# EAGLE board opbouw (EAGLE 6.3)
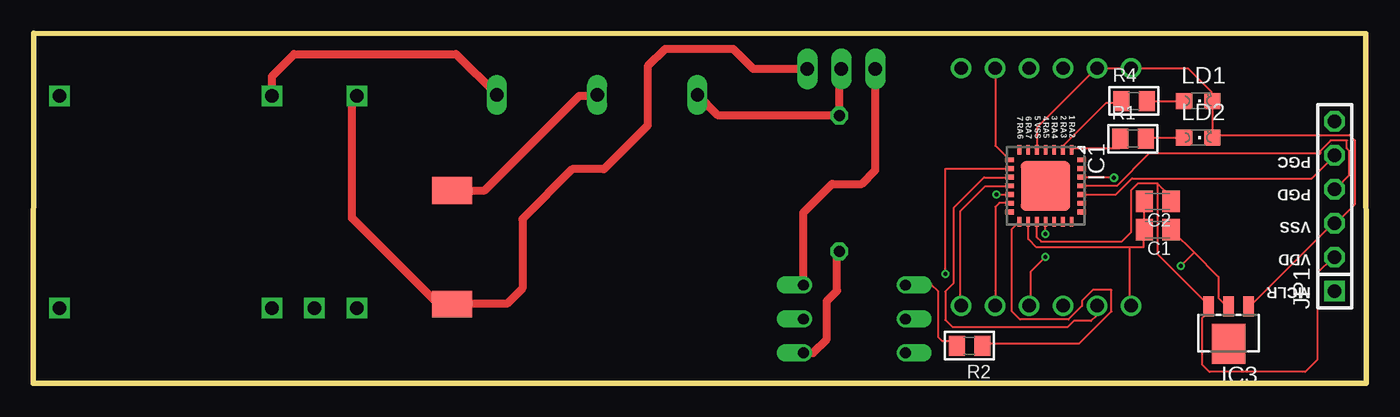
[diagram p0: board, top side]
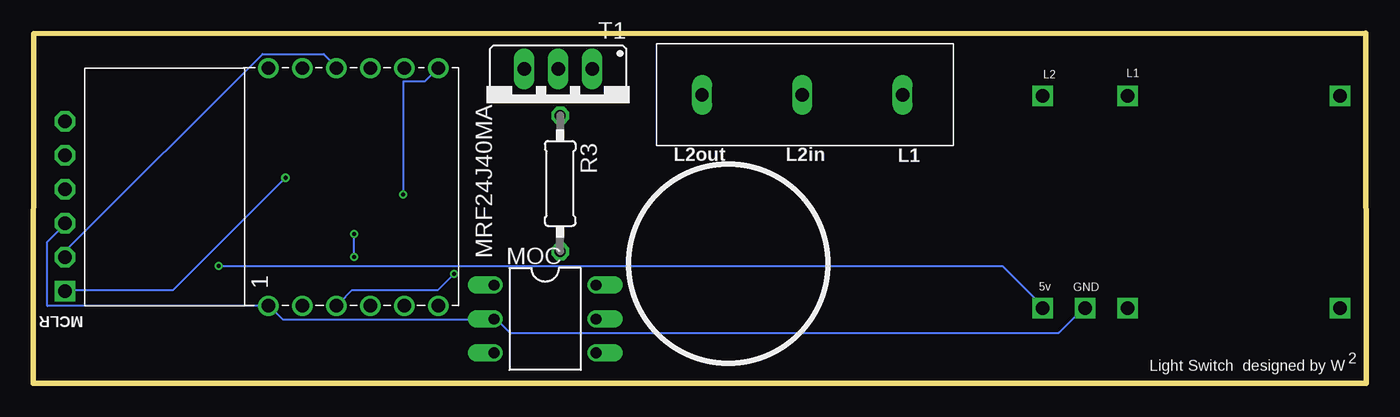
[diagram p1: board, bottom side, seen from below]

Size 99.62 x 26.18 mm. Coordinates in mm from the lower left corner, seen from the top.
Outline: 0,0 0.02,26.18 99.6,26.14 99.62,0 0,0
Copper layers (1*16): Top 0.035mm / dielectric 1.5mm / Bottom 0.035mm
Design rules "ITEADstudio_DRC": minimum track width 6mil, minimum drill 12mil, track to track 6mil, track to pad 6mil, pad to pad 6mil, via to via 6mil, smd to smd 0mil, copper to edge 10mil, drill to drill 10mil, minimum pad ring 10mil, minimum via ring 6mil, stop-mask expansion 2mil, vias tented up to drill 100mil, thermal gap 10mil

## Footprints (pad centres in the part's own frame; a part is rotated, then mirrored left to right if it is on the bottom)
C0805K = smd 1.3 x 1.6: 1 -1,0; 2 1,0
QFN28-ML_6X6MM = smd 0.7 x 0.35: 1 -2.7,1.95; 2 -2.7,1.3; 3 -2.7,0.65; 4 -2.7,0; 5 -2.7,-0.65; 6 -2.7,-1.3; 7 -2.7,-1.95; 15 2.7,-1.95; 16 2.7,-1.3; 17 2.7,-0.65; 18 2.7,0; 19 2.7,0.65; 20 2.7,1.3; 21 2.7,1.95 | smd 0.35 x 0.7: 8 -1.95,-2.7; 9 -1.3,-2.7; 10 -0.65,-2.7; 11 0,-2.7; 12 0.65,-2.7; 13 1.3,-2.7; 14 1.95,-2.7; 22 1.95,2.7; 23 1.3,2.7; 24 0.65,2.7; 25 0,2.7; 26 -0.65,2.7; 27 -1.3,2.7; 28 -1.95,2.7 | smd 3.7 x 3.7: EXP 0,0
SOT89 = smd 0.8 x 1.5: 1 -1.5,-1.75; 2 0,-1.75; 3 1.5,-1.75 | smd 2.5 x 3: 4 0,1.05
1X06 = drill 1.016 square: 1 -6.35,0 | drill 1.016 octagon: 2 -3.81,0; 3 -1.27,0; 4 1.27,0; 5 3.81,0; 6 6.35,0
CHIPLED_0805 = smd 1.2 x 1.2: A 0,-1.05; C 0,1.05
DIL06 = drill 0.813 offset: 1 -2.54,-3.81; 2 0,-3.81; 3 2.54,-3.81; 4 2.54,3.81; 5 0,3.81; 6 -2.54,3.81
R0805 = smd 1.2 x 1.5: 1 -0.953,0; 2 0.953,0
0207/10 = drill 0.813 octagon: 1 -5.08,0; 2 5.08,0
TO220CS = drill 1.016 long: A 0,-2.54; C -2.54,-2.54; G 2.54,-2.54
MRF24J40MA = drill 1: CS(LOW) 16.764,4.064; GND -1.016,14.224; GND1 16.764,11.684; GND2 16.764,14.224; INT -1.016,6.604; NC 16.764,6.604; RESET -1.016,11.684; SCK -1.016,1.524; SDI -1.016,4.064; SDO 16.764,1.524; VIN 16.764,9.144; WAKE -1.016,9.144
CONNECTOR = drill 1 long: P$1 0,0; P$2 7.5,0; P$3 15,0
FUSE = smd 2 x 3: P$1 -1,0; P$2 7.5,0
BIAS = drill 1 square: P$1 22.225,0; P$2 15.875,0; P$3 22.225,15.875; P$4 19.05,15.875; P$5 15.875,15.875; P$8 0,15.875; P$99 0,0

## Placement (x,y rotation side)
C1  [C0805K]  84.04,11.49 180 top
C2  [C0805K]  84.04,13.61 180 top
IC1  PIC24FJ16GA002_QFN  [QFN28-ML_6X6MM]  75.66,14.78 270 top
IC3  S-812XSGUP  [SOT89]  89.34,4.02 180 top
JP1  [1X06]  97.28,13.25 90 top
LD1  [CHIPLED_0805]  87.07,21.13 270 top
LD2  [CHIPLED_0805]  87.07,18.38 270 top
MOC  4N33  [DIL06]  61.37,4.81 270 bottom
R1  [R0805]  82.19,18.31 0 top
R2  [R0805]  69.98,2.81 180 top
R3  [0207/10]  60.24,14.95 270 bottom
R4  [R0805]  82.27,21.13 0 top
T1  TIC126  [TO220CS]  60.4,20.97 180 bottom
U$1  MRF24J40MA  [MRF24J40MA]  67.83,6.82 90 bottom
U$2  CONNECTOR  [CONNECTOR]  34.64,21.58 0 top
U$3  FUSEFUSE  [FUSE]  31.29,13.43 270 top
U$4  BIAS  [BIAS]  1.95,21.51 180 bottom

## Library data of the parts
C1 C2 R3 = rcl 2
IC1 = microchip; MPN: PIC24FJ16GA002-I/ML; OC_FARNELL: unknown; OC_NEWARK: 40M1425
IC3 = v-reg-3
JP1 = pinhead 2
LD1 LD2 = led 2
MOC = optocoupler; MF: VISHAY/TELEFUNKEN; MPN: 4N33; OC_FARNELL: 1469601; OC_NEWARK: 88K1390
R1 R2 R4 = rc-master
T1 = triggered_devices
U$1 = MRF24J40MA
U$2 = connector7.5mm
U$3 = fuse
U$4 = bias

## Nets
N$1: C2.1 IC1.17 IC3.3 JP1.2 U$1.VIN
N$3: IC1.26 JP1.1
N$4: IC1.25 JP1.4
N$5: IC1.24 JP1.5
N$6: IC1.8 U$1.CS(LOW)
N$7: IC1.15 R2.1
N$8: IC1.10 U$1.RESET
N$9: IC1.13 U$1.SDI
N$10: IC1.18 U$1.INT
N$11: IC1.9 U$1.WAKE
N$12: IC1.11 U$1.SCK
N$13: MOC.6 T1.G
N$14: MOC.1 R2.2
N$15: IC1.12 U$1.SDO
N$16: MOC.4 R3.2
N$17: U$2.P$2 U$3.P$1
N$18: R3.1 T1.A U$2.P$3
N$21: IC1.1 R1.1
N$22: IC1.2 R4.1
N$23: LD2.A R1.2
N$24: LD1.A R4.2
N$25: C1.2 C2.2 IC1.5 IC1.16 IC3.1 JP1.3 LD1.C LD2.C MOC.2 U$1.GND U$1.GND1 U$1.GND2 U$4.P$4
N$28: C1.1 IC3.2 U$4.P$3
N$32: T1.C U$3.P$2 U$4.P$1
N$34: U$2.P$1 U$4.P$2

## Tracks (layer width: path | path; a pad name or v marks a point on that pad's centre or on a via)
N$1
  Top 0.152: 84.02,14.95 82.57,14.95 82.04,14.42 82.04,11.3 81.35,10.61 75.33,10.61 75.03,10.91 75.03,11.98 IC1.17 | 84.02,14.95 84.93,14.04 C2.1 | 84.02,14.95 84.02,9.7 87.83,5.89 IC3.3 | 87.83,5.73 IC3.3 | JP1.2 97.13,9.39 95.98,8.25 95.98,1.77 95.07,0.86 87.91,0.86 87.37,1.39 87.37,4.89 87.75,5.28 87.75,5.68 IC3.3
  Bottom 0.152: U$1.VIN 77.01,23.72 77.92,24.63 82.5,24.63 97.13,10 97.13,9.54 JP1.2
N$3  (via drill 0.3)
  Top 0.152: v80.78,15.38 78.38,15.38 IC1.26
  Bottom 0.152: v80.78,15.38 89.18,6.98 97.18,6.98 JP1.1
N$4
  Top 0.152: IC1.25 78.38,14.78 80.98,14.78 83.38,17.18 96.18,17.18 96.18,17.38 96.98,18.18 98.18,18.18 98.18,17.58 98.38,17.38 98.38,15.58 97.38,14.58 JP1.4
N$5
  Top 0.152: IC1.24 80.91,14.12 82.11,15.33 95.55,15.33 JP1.5
N$6
  Top 0.152: U$1.CS(LOW) 71.9,17.79 IC1.8
N$7
  Top 0.152: IC1.15 73.58,11.98 73.16,11.56 73.16,5.38 73.76,4.78 77.38,4.78 78.38,5.78 78.38,6.18 79.18,6.98 80.58,6.98 80.58,5.38 78.18,2.98 70.98,2.98 R2.1
N$8
  Top 0.152: 79.52,5.73 U$1.RESET 79.45,5.73 79.45,5.05 79.07,4.67 77.77,4.67 77.31,4.21 68.7,4.21 68.17,4.74 68.17,6.88 68.78,7.49 68.78,13.12 71.06,15.41 72.94,15.41 IC1.10 72.89,15.41
N$9
  Top 0.152: U$1.SDI 71.9,6.95 71.9,13.2 72.21,13.51 72.82,13.51 IC1.13
N$10  (via drill 0.3)
  Top 0.152: v75.66,11.18 IC1.18 | v75.66,9.46 74.58,8.38 74.58,5.98 U$1.INT
  Bottom 0.152: v75.66,9.46 v75.66,11.18
N$11  (via drill 0.3)
  Top 0.152: v68.18,8.18 68.18,16.06 72.78,16.06 IC1.9
  Bottom 0.152: v68.18,8.18 69.38,6.98 75.78,6.98 76.78,5.98 U$1.WAKE
N$12
  Top 0.152: U$1.SCK 69.31,6.27 69.31,12.9 71.14,14.72 72.82,14.72 IC1.11
N$13
  Top 0.61: MOC.6 57.55,12.77 59.71,14.93 61.92,14.93 62.94,15.94 T1.G
N$14
  Top 0.152: R2.2 68.93,2.69 68.7,3.14 67.94,3.14 67.64,3.45 67.64,6.88 67.1,7.41 65.19,7.41 MOC.1
N$15  (via drill 0.3)
  Top 0.152: v71.98,14.12 72.76,14.12 IC1.12
  Bottom 0.152: v71.98,14.12 71.98,22.58 70.38,22.58 69.38,23.58 U$1.SDO
N$16
  Top 0.61: MOC.4 58.28,2.27 59.3,3.29 59.3,6.17 60.07,6.93 60.07,9.62 R3.2
N$17
  Top 0.61: U$3.P$1 33.74,14.43 40.81,21.51 42.06,21.51 U$2.P$2
N$18
  Top 0.61: T1.A 60.24,23.36 R3.1 51.19,20.03 U$2.P$3
N$21
  Top 0.152: IC1.1 77.78,17.58 81.18,17.58 81.18,18.18 R1.1
N$22
  Top 0.152: 76.93,17.54 IC1.2 76.98,17.58 76.94,17.56 76.92,17.72 80.18,20.98 81.18,20.98 R4.1
N$23
  Top 0.152: LD2.A 83.18,18.38 83.18,18.31 R1.2
N$24
  Top 0.152: LD1.A 83.33,21.13 83.26,21.2 83.18,21.13 R4.2
N$25
  Top 0.152: C2.2 C1.2 82.98,11.38 82.98,10.18 81.98,10.18 | IC1.5 75.03,17.62 75.03,19.14 79.45,23.56 U$1.GND1 U$1.GND2 82.04,23.56 86.31,23.56 88.06,21.81 88.06,21.18 LD1.C | LD1.C 88.13,21.13 88.13,18.38 LD2.C 88.18,18.58 98.38,18.58 98.78,18.18 98.78,13.38 97.38,11.98 JP1.3 97.18,11.98 90.98,5.78 IC3.1 | 87.98,21.2 88.06,21.13 LD1.C | 81.98,10.18 74.98,10.18 74.36,10.8 74.36,11.8 74.38,11.98 IC1.16 | 81.98,10.18 81.98,5.98 U$1.GND
  Bottom 0.152: 82.19,5.89 U$1.GND | U$1.GND 81.98,5.78 80.98,4.78 65.18,4.78 MOC.2 64.98,4.78 63.98,3.78 22.98,3.78 21.18,5.58 U$4.P$4 | JP1.3 97.38,11.78 98.58,10.58 98.58,5.78 82.18,5.78 U$1.GND
N$28  (via drill 0.3)
  Top 0.152: 86.78,9.78 85.18,11.38 C1.1 | 86.78,9.78 88.58,7.98 88.58,6.38 89.18,5.78 IC3.2 | 86.78,9.78 v85.78,8.78
  Bottom 0.152: v85.78,8.78 27.18,8.78 24.18,5.78 U$4.P$3
N$32
  Top 0.61: T1.C 53.82,23.51 52.32,25.01 47.22,25.01 45.92,23.72 45.92,19.3 42.64,16.02 40.28,16.02 36.55,12.29 36.55,7.11 35.4,5.96 31.32,5.96 U$3.P$2 30.25,5.93 23.82,12.36 23.82,21.15 U$4.P$1
N$34
  Top 0.61: U$4.P$2 17.83,22.98 19.48,24.63 31.59,24.63 U$2.P$1

## Text on the board
tPlace: 1 RA2 / 2 RA3 / 3 RA4 / 4 RA5 / 5 VSS / 6 RA7 / 7 RA6 | MCLR / / VDD / / VSS / / PGD / / PGC
bPlace: L1 | L2in | L2out | MCLR | Light Switch designed by W | 2